# Altium PCB PCB1.PcbDoc
Units mil, origin at the board's own origin, x right, y up, seen from the top; angles counter-clockwise.
Board outline 6000 x 4000 mil, 2 copper layers (Top Layer, Bottom Layer); 127 components, 60 nets, 327 pads, 18 vias.
Unrouted connection lines stored in the file: 71.
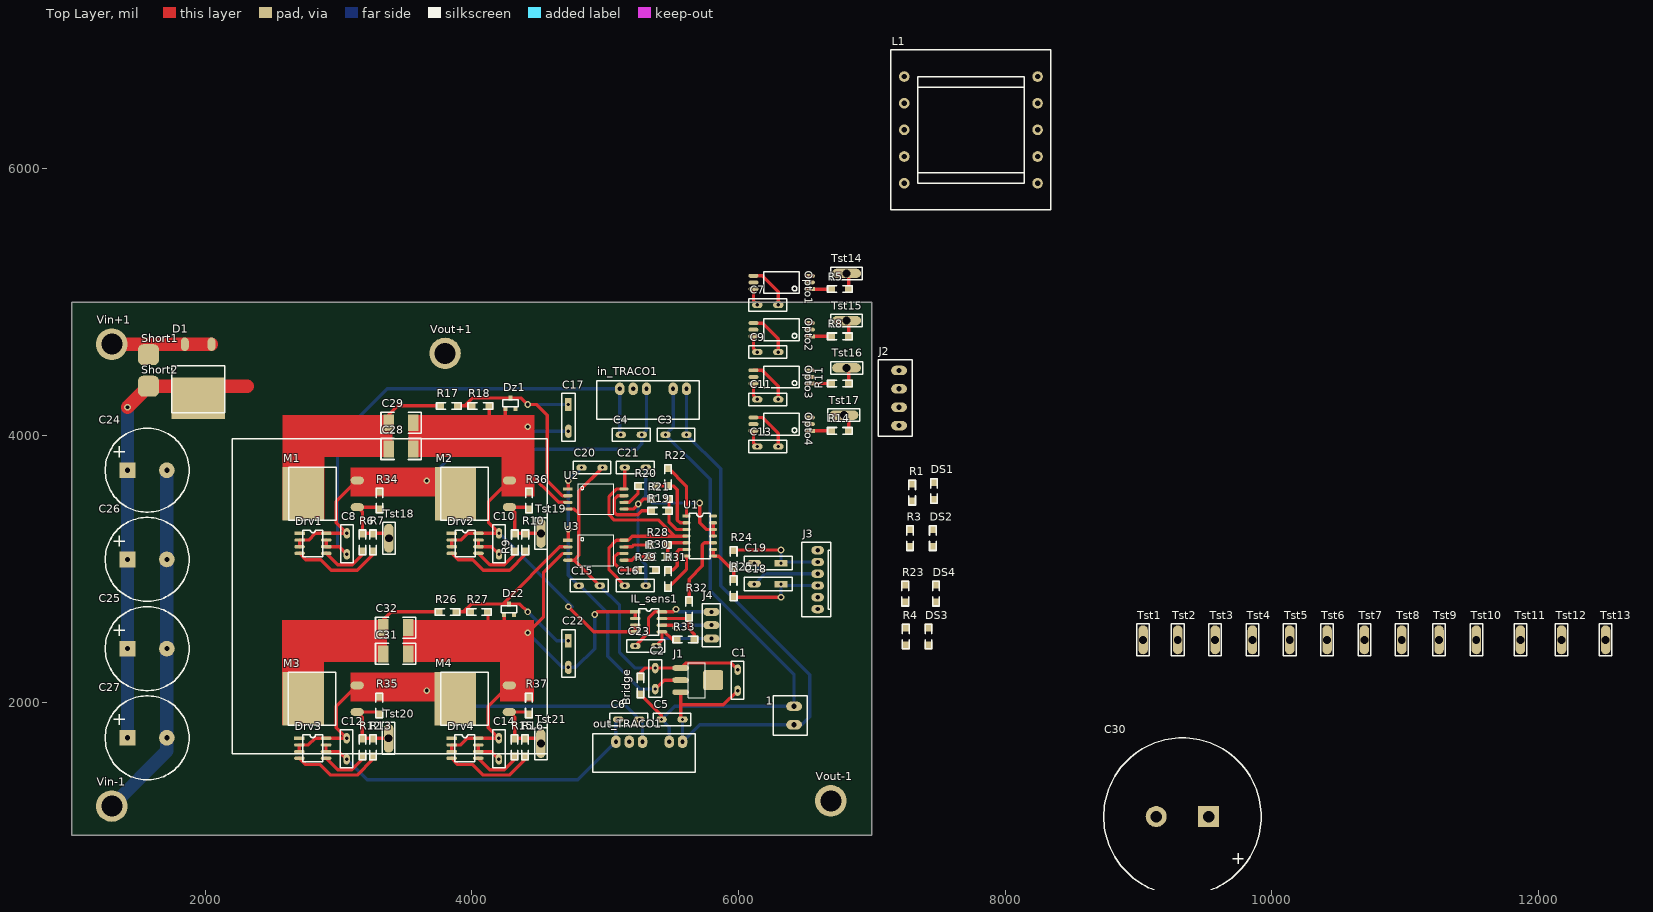
[diagram p0: Top Layer view]
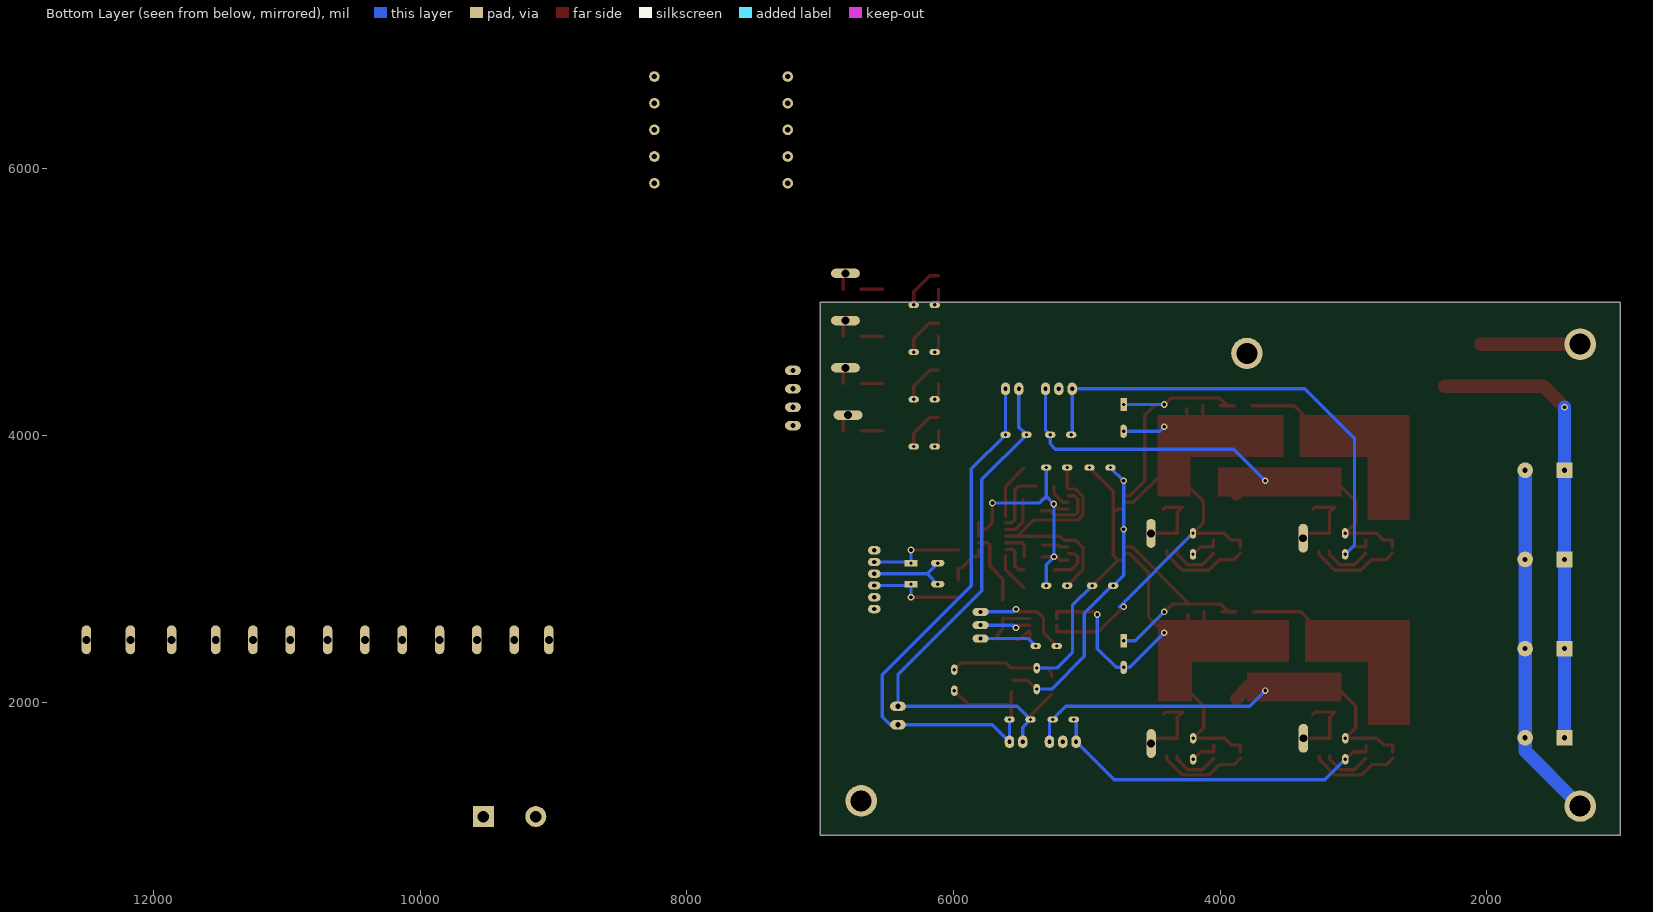
[diagram p1: Bottom Layer view, seen from below]

## Layer stack, top to bottom
Top Solder: solder mask 0.4, Solder Resist, Dk 3.5
Top Layer: signal copper 1.4
Dielectric 1: dielectric 12.6, FR-4, Dk 4.8
Bottom Layer: signal copper 1.4
Bottom Solder: solder mask 0.4, Solder Resist, Dk 3.5

## Board outline
1000,1000 7000,1000 7000,5000 1000,5000

## Design rules (kind name [scope] priority, off if disabled: settings)
Clearance Clearance_1 [All] p1: gap=11.81
Clearance [All] p2: gap=10
PolygonConnect [All] p1: connectstyle=Relief reliefconductorwidth=10 reliefentries=4 polygonreliefangle="90 Angle" airgapwidth=10
RoutingVias [All] p1: holewidth=28 width=50 viastyle="Through Hole" minholewidth=28 minwidth=50 maxholewidth=28 maxwidth=50
SolderMaskExpansion [All] p1: expansion=4
Width [All] p1: maxlimit=393.7 minlimit=11.81 preferedwidth=23.62
30 further rules are at their usual default settings.

## Classes and differential pairs
component class Switches: C24 C25 C26 C27 C28 C29 C30 C31 C32 D1 L1 M1 M2 M3 M4 R34 R35 R36 R37 Short1 Short2 Vin+1 Vin-1 Vout+1 Vout-1
component class Power_supplies: 1 Bridge C1 C2 C3 C4 C5 C6 DS1 DS2 DS3 in_TRACO1 J1 out_TRACO1 R1 R3 R4 Tst1 Tst2 Tst3 Tst4 Tst5 Tst6 Tst7 Tst8 Tst9 Tst10 Tst11 Tst12 Tst13
component class Drivers: C7 C8 C9 C10 C11 C12 C13 C14 C? Drv1 Drv2 Drv3 Drv4 IC? J2 Opto1 Opto2 Opto3 Opto4 R5 R6 R7 R8 R9 R10 R11 R12 R13 R14 R15 R16 Tst14 Tst15 Tst16 Tst17 Tst18 Tst19 Tst20 Tst21
component class Signal_processing: B? C15 C16 C17 C18 C19 C20 C21 C22 C23 DS4 Dz1 Dz2 IL_sens1 J3 J4 R17 R18 R19 R20 R21 R22 R23 R24 R25 R26 R27 R28 R29 R30 R31 R32 R33 U1 U2 U3 U?

## Components (designator, comment, footprint, x,y, rotation, side; value= is the part's Value field where it differs from the comment)
1 "Cleva 2 vias" "CON2_EXTRON _3.5MMPITCH" 6417.32,1968.5 r270 top
Bridge "Res. Bridge" 1206 5265.75,2057.09 r90 top (schematic designator R2)
C1 "100nF" CAP100NF_AAU 5994.09,2244.09 r270 top
C2 "100nF" CAP100NF_AAU 5375.98,2255.91 r270 top
C3 "100nF" CAP100NF_AAU 5452.76,4005.91 r0 top
C4 "100nF" CAP100NF_AAU 5118.11,4005.91 r0 top
C5 "100nF" CAP100NF_AAU 5423.23,1870.08 r0 top
C6 "100nF" CAP100NF_AAU 5098.43,1870.08 r0 top
C7 "100nF" CAP100NF_AAU 6141.73,4980.31 r0 top
C8 "100nF" CAP100NF_AAU 3062.48,3266.14 r270 top
C9 "100nF" CAP100NF_AAU 6141.73,4625.98 r0 top
C10 "100nF" CAP100NF_AAU 4204.21,3266.14 r270 top
C11 "100nF" CAP100NF_AAU 6141.73,4271.65 r0 top
C12 "100nF" CAP100NF_AAU 3061.02,1729.13 r270 top
C13 "100nF" CAP100NF_AAU 6141.73,3917.32 r0 top
C14 "100nF" CAP100NF_AAU 4202.76,1729.13 r270 top
C15 "100nF" CAP100NF_AAU 4960.63,2874.02 r180 top
C16 "100nF" CAP100NF_AAU 5305.12,2874.02 r180 top
C17 "66nF" "CONDENSADOR_MKP_200MILIS - DUPLICATE" 4724.41,4232.28 r270 top
C18 "4.7nF" "CONDENSADOR_MKP_200MILIS - DUPLICATE" 6318.9,2885.43 r180 top
C19 "470pF" "CONDENSADOR_MKP_200MILIS - DUPLICATE" 6318.9,3042.91 r180 top
C20 "100nF" CAP100NF_AAU 4980.31,3759.84 r180 top
C21 "100nF" CAP100NF_AAU 5305.12,3759.84 r180 top
C22 "27nF" "CONDENSADOR_MKP_200MILIS - DUPLICATE" 4724.41,2460.63 r270 top
C23 "100nF" CAP100NF_AAU 5383.86,2421.26 r180 top
C24 "470µF" CE_16DX35MM_PITCH7.5MM 1417.32,3740.16 r0 top
C25 "470µF" CE_16DX35MM_PITCH7.5MM 1417.32,2401.57 r0 top
C26 "470µF" CE_16DX35MM_PITCH7.5MM 1417.32,3070.87 r0 top
C27 "470µF" CE_16DX35MM_PITCH7.5MM 1417.32,1732.28 r0 top
C28 "100nF" 1812 3377.44,3899.21 r0 top
C29 "1uF" 1812 3377.44,4096.06 r0 top
C30 "820µF" CE_30DX35MM_PITCH10MM 9527.56,1141.73 r180 top
C31 "100nF" 1812 3336.61,2362.2 r0 top
C32 "1uF" 1812 3336.61,2559.06 r0 top
D1 "????" "D2PAK - DIODE" 2047.24,4685.04 r180 top
Drv1 "NCP81074A" NCP81074A 2708.15,3266.14 r0 top
Drv2 "NCP81074A" NCP81074A 3849.88,3266.14 r0 top
Drv3 "NCP81074A" NCP81074A 2706.69,1729.13 r0 top
Drv4 "NCP81074A" NCP81074A 3848.43,1729.13 r0 top
DS1 "Verde" "LED SMD" 7466.24,3516.85 r90 top
DS2 "Verde" "LED SMD" 7458.11,3162.52 r90 top
DS3 "Verde" "LED SMD" 7425.56,2424.33 r90 top
DS4 "Verde" "LED SMD" 7481.49,2746.06 r90 top
Dz1 "4.7V" "SOT23 - ZENNER" 4251.97,4202.76 r0 top
Dz2 "4.7V" "SOT23 - ZENNER" 4242.13,2657.48 r0 top
IL_sens1 "ACS723LLCTR-20AB-T" SOIC8_GND 5226.38,2677.17 r0 top
in_TRACO1 "TRACO" TRACO_TMA1212S 5610.24,4350.39 r180 top
J1 "LD1117" SOT-223_LM1117 5688.35,2165.35 r270 top
J2 "CON4" "CON4_EXTRON _3.5MMPITCH" 7204.72,4488.19 r270 top
J3 "CON6" ? 6594.49,2698.43 r90 top
J4 "Cleva 2 vias" CON_3_100MILIS 5797.24,2677.17 r0 top
L1 "mH" E30 7244.09,6692.91 r0 top
M1 "MOSFET N" "D2PAK - MOSFET" 3141.22,3462.99 r90 top
M2 "MOSFET N" "D2PAK - MOSFET" 4282.95,3462.99 r90 top
M3 "MOSFET N" "D2PAK - MOSFET" 3139.76,1925.98 r90 top
M4 "MOSFET N" "D2PAK - MOSFET" 4281.5,1925.98 r90 top
Opto1 "ACPL-W70L" SSOIC6 6535.43,5098.43 r180 top
Opto2 "ACPL-W70L" SSOIC6 6535.43,4744.09 r180 top
Opto3 "ACPL-W70L" SSOIC6 6535.43,4389.76 r180 top
Opto4 "ACPL-W70L" SSOIC6 6535.43,4035.43 r180 top
out_TRACO1 "TRACO" TRACO_TMA1212S 5580.71,1702.76 r180 top
R1 "RK" 1206 7303.15,3503.94 r90 top
R3 "RK" 1206 7287.82,3162.52 r90 top
R4 "RK" 1206 7255.28,2424.33 r90 top
R5 "560OHM" 1206 6692.91,5098.43 r0 top
R6 "25" 1206 3180.59,3266.14 r270 top
R7 "560OHM" 1206 3259.33,3266.14 r270 top
R8 "560OHM" 1206 6692.91,4744.09 r0 top
R9 "560OHM" 1206 4322.32,3266.14 r270 top
R10 "560OHM" 1206 4401.06,3266.14 r270 top
R11 "560OHM" 1206 6692.91,4389.76 r0 top
R12 "560OHM" 1206 3179.13,1729.13 r270 top
R13 "560OHM" 1206 3257.87,1729.13 r270 top
R14 "560OHM" 1206 6692.91,4035.43 r0 top
R15 "560OHM" 1206 4320.87,1729.13 r270 top
R16 "560OHM" 1206 4399.61,1729.13 r270 top
R17 "47k" 1206 3759.84,4222.44 r0 top
R18 "2k" 1206 3996.06,4222.44 r0 top
R19 "11k" 1206 5344.49,3435.04 r0 top
R20 "11k" 1206 5246.06,3622.05 r0 top
R21 "27k" 1206 5479.33,3523.62 r180 top
R22 "27k" 1206 5472.44,3622.05 r90 top
R23 "RK" 1206 7251.16,2746.06 r90 top
R24 "6k8" 1206 5964.57,3141.34 r270 top
R25 "680k" 1206 5964.57,2787.01 r90 top
R26 "120k" 1206 3750,2677.17 r0 top
R27 "2k" 1206 3986.22,2677.17 r0 top
R28 "11k" 1206 5334.65,3179.13 r0 top
R29 "11k" 1206 5246.06,2992.13 r0 top
R30 "27k" 1206 5469.49,3090.55 r180 top
R31 "27k" 1206 5472.44,2992.13 r270 top
R32 "10k" 1206 5629.92,2765.75 r270 top
R33 "10k" 1206 5669.29,2470.47 r180 top
R34 "68K" 1206 3307.09,3444.88 r90 top
R35 "68K" 1206 3305.63,1907.87 r90 top
R36 "68K" 1206 4429.13,3444.88 r90 top
R37 "68K" 1206 4427.68,1907.87 r90 top
Short1 "CON1" SHORTPAD 1574.8,4606.3 r270 top
Short2 "CON1" SHORTPAD 1574.8,4370.08 r270 top
Tst1 "Test Point" TEST_POINT 9035.87,2467.64 r0 top
Tst2 "Test Point" TEST_POINT 9295.73,2467.64 r0 top
Tst3 "Test Point" TEST_POINT 9576.25,2467.64 r0 top
Tst4 "Test Point" TEST_POINT 9855.8,2467.64 r0 top
Tst5 "Test Point" TEST_POINT 10135.34,2467.64 r0 top
Tst6 "Test Point" TEST_POINT 10415.86,2467.64 r0 top
Tst7 "Test Point" TEST_POINT 10695.4,2467.64 r0 top
Tst8 "Test Point" TEST_POINT 10975.93,2467.64 r0 top
Tst9 "Test Point" TEST_POINT 11255.47,2467.64 r0 top
Tst10 "Test Point" TEST_POINT 11535.01,2467.64 r0 top
Tst11 "Test Point" TEST_POINT 11865.74,2467.64 r0 top
Tst12 "Test Point" TEST_POINT 12174.81,2467.64 r0 top
Tst13 "Test Point" TEST_POINT 12505.53,2467.64 r0 top
Tst14 "Test Point" TEST_POINT 6811.02,5216.54 r90 top
Tst15 "Test Point" TEST_POINT 6811.02,4862.2 r90 top
Tst16 "Test Point" TEST_POINT 6811.02,4507.87 r270 top
Tst17 "Test Point" TEST_POINT 6791.34,4153.54 r90 top
Tst18 "Test Point" TEST_POINT 3377.44,3229.92 r180 top
Tst19 "Test Point" TEST_POINT 4519.17,3266.14 r180 top
Tst20 "Test Point" TEST_POINT 3375.98,1729.13 r0 top
Tst21 "Test Point" TEST_POINT 4517.72,1689.76 r180 top
U1 "LMC6484IM" SOIC_14 5610.24,3395.67 r0 top
U2 "ACPL-C870-000E" SSOP8 4931.1,3523.62 r0 top
U3 "ACPL-C870-000E" SSOP8 4931.1,3139.76 r0 top
Vin+1 "CON1" POWERHOLE 1299.21,4685.04 r0 top
Vin-1 "CON1" POWERHOLE 1299.21,1220.47 r0 top
Vout+1 "CON1" POWERHOLE 3799.21,4616.14 r0 top
Vout-1 "CON1" POWERHOLE 6692.91,1259.84 r0 top

## Footprints (in the part's own frame and the unit in brackets; to place one, negate y for a bottom-side part, rotate by r counter-clockwise, add the part's x,y. Pads: shape width x height; smd on the part's side, far side on the other; paste and mask are expansions set on the pad)
1206 [mil] "SMD R&C"
  rect 60x60 smd: 1(0,0) 2(135,0)
  silkscreen extent -25,-25 160,25, body extent 2,-31 128,31
1812 [mm]
  rect 2x3.2 smd: 1(0,0) 2(4.7,0)
  silkscreen extent -1.5,-2 6.2,2
CAP100NF_AAU [mm] "10nF 1600v"
  oval 2x1.2 hole 0.635: 1(0,0) 2(4,0)
  silkscreen extent -1.6,-1.2 5.6,1.2
CE_16DX35MM_PITCH7.5MM [mm]
  rect 3x3 hole 1: 1(0,0)
  round 3 hole 1: 2(7.5,0)
  silkscreen extent -4.25,-8 11.75,8
CE_30DX35MM_PITCH10MM [mm]
  rect 4x4 hole 2.2: 1(0,0)
  round 4 hole 2.2: 2(10,0)
  silkscreen extent -10,-15 20,15
"CON2_EXTRON _3.5MMPITCH" [mm]
  oval 1.8x3 hole 1: 1(0,0) 2(3.5,0)
  silkscreen extent -2,-4 5.5,2.5
"CON4_EXTRON _3.5MMPITCH" [mm]
  oval 1.8x3 hole 1: 1(0,0) 2(3.5,0) 3(7,0) 4(10.5,0)
  silkscreen extent -2,-4 12.5,2.5
CON_3_100MILIS [mil]
  oval 120x60 hole 29.53: 1(0,0) 2(0,-100) 3(0,-200)
  silkscreen extent -70,-260 65,60
"CONDENSADOR_MKP_200MILIS - DUPLICATE" [mil] "10nF 1600v"
  rect 100x50 hole 25: 1(0,0)
  oval 100x50 hole 25: 2(200,0)
  silkscreen extent -84,-50 275,50
"D2PAK - DIODE" [mil] "TO220-superficie"
  oval 60x100 smd: A(0,0) A(200,0)
  rect 400x310 smd: K(100,405)
  silkscreen extent -100,160 300,515
"D2PAK - MOSFET" [mil] "TO220-superficie"
  rect 400x310 smd: D(100,405)
  oval 60x100 smd: G(0,0) S(200,0)
  silkscreen extent -100,160 300,515
E30 [mil]
  round 80 hole 40: 1(0,-800) 1(0,-600) 1(0,-400) 1(0,-200) 1(0,0) 2(1000,-800) 2(1000,-600) 2(1000,-400) 2(1000,-200) 2(1000,0)
  silkscreen extent -100,-1000 1100,200
"LED SMD" [mil] "SMD R&C"
  rect 60x60 smd: A(0,0) K(135,0)
  silkscreen extent -25,-25 160,25
NCP81074A [mil] "Driver"
  rect 80x25 smd: 1(0,0)
  oval 80x25 smd: 2(0,-50) 3(0,-100) 4(0,-150) 5(200,-150) 6(200,-100) 7(200,-50) 8(200,0)
  silkscreen extent 25,-175 175,25
POWERHOLE [mm]
  round 6 hole 4: 1(0,0)
SHORTPAD [mm]
  rrect50% 4x4 smd: 1(0,0)
SOIC8_GND [mil] "Con plano de masa inferior"
  rect 80x25 smd: 1(0,0)
  oval 80x25 smd: 2(0,-50) 3(0,-100) 4(0,-150) 5(200,-150) 6(200,-100) 7(200,-50) 8(200,0)
  silkscreen extent 25,-175 175,25
SOIC_14 [mil]
  rect 60x24 smd: 1(0,0)
  oval 60x24 smd: 2(0,-50) 3(0,-100) 4(0,-150) 5(0,-200) 6(0,-250) 7(0,-300) 8(200,-300) 9(200,-250) 10(200,-200) 11(200,-150) 12(200,-100) 13(200,-50) 14(200,0)
  silkscreen extent 20,-320 180,20
"SOT23 - ZENNER" [mm] "Transistor SMD"
  rect 0.8x0.9 smd: A(0,0) K(0.95,2) NC(1.9,0)
  silkscreen extent -0.5,0.3 2.4,1.7
SOT-223_LM1117 [mm] "SOT-223/SC-73; 4 Leads; Body 6.7 x 7.3 mm, inc. leads (LxW max)"
  oval 1.1x3.15 smd: 1(-2.3,-3.1) 2(0,-3.1) 3(2.3,-3.1)
  rrect20% 3.8x3.8 smd: ""(0,3.1)
  silkscreen extent -3.35,-1.63 3.35,1.63
SSOIC6 [mm] "Circuito de 6 patas SMD"
  rect 1.91x0.762 smd: 1(0,0)
  oval 1.91x0.762 smd: 2(0,-1.27) 3(0,-2.54) 4(10.74,-2.54) 5(10.74,-1.27) 6(10.74,0)
  silkscreen extent 2,-3.34 8.74,0.8
SSOP8 [mm]
  rect 1.8x0.6 smd: 1(-5.35,1.905)
  oval 1.8x0.6 smd: 2(-5.35,0.635) 3(-5.35,-0.635) 4(-5.35,-1.905) 5(5.35,-1.905) 6(5.35,-0.635) 7(5.35,0.635) 8(5.35,1.905)
  silkscreen extent -3.4,-2.93 3.4,2.93
TEST_POINT [mm]
  oval 1.8x5.5 hole 1.5: 1(0,0)
  silkscreen extent -1.2,-3 1.2,3.05
TRACO_TMA1212S [mm]
  oval 1.8x2.4 hole 0.8: 1(0,0) 2(2.54,0) 4(7.62,0) 5(10.16,0) 6(12.7,0)
  silkscreen extent -2.4,-1.5 17.1,5.8
? [mm]
  oval 1.6x2.4 hole 0.8: 1(0,0) 2(2.24,0) 3(4.48,0) 4(6.72,0) 5(8.96,0) 6(11.2,0)
  silkscreen extent -1.5,-2.5 12.7,3

## Part data
1: library part Con_2
Bridge: "Resistencia Bridge"
C1 C2 C3 C4 C5 C6 C7 C8 C9 C10 C11 C12 C13 C14 C15 C16 C17 C18 C19 C20 C21 C22 C23 C28 C29 C31 C32: library part Condensador, "Condensador"
C24 C25 C26 C27 C30: library part Cond_Electrolítico, "Condensador Aluminio con polaridad"
D1: library part Diodo, "Diodo"
DS1 DS2 DS3 DS4: library part Led
Dz1 Dz2: library part Zener
IL_sens1: "Current Sensor AC/DC 5V 8-Pin SOIC N Allegro Microsystems ACS723LLCTR-20AB-T, Current Sensor, 8-Pin, SOIC"
in_TRACO1 out_TRACO1: "TracoPower TMA1212S"
J1: "Linear voltage regulator"
J3: "CONECTOR 6 PINES"
J4: library part Con_3
L1: library part Bobina
M1 M2 M3 M4: "MOSFET de canal N"
R1 R3 R4 R5 R6 R7 R8 R9 R10 R11 R12 R13 R14 R15 R16 R17 R18 R19 R20 R21 R22 R23 R24 R25 R26 R27 R28 R29 R30 R31 R32 R33 R34 R35 R36 R37: library part Resistencia, "Resistencia"
U1: library part LMC6484IM_1, "14 pin CMOS Quad Rail to Rail Input and Output Operational Amplifier 55 per tube"
U2 U3: "Isolation Amplifier [Broadcom] ACPL-C870-000E Isolation Amplifier"

## Via types
v1: diameter 50, hole 28, Top Layer to Bottom Layer, 18 vias

## Nets (pads, with @x,y where several pads share a name; then routed paths per layer and width w, separated by ;. In a path a pad name is that pad's centre, name@x,y a point inside that pad or via, vN(x,y) a via of type N, cw(c..) or ccw(c..) an arc to the next point about the centre after c; other vN are vias at no path point)
5V_HV: C2.2 C15.2 C20.2 DS1.A J1.2 Tst12.1 U2.1 U3.1 | length 2392.8
  Top Layer w25: U2.1 4724.41,3602.56 v1(4724.41,3661.42) ; U3.1@4724.41,3218.7 v1(4724.41,3297.24) ; C2.2 5442.91,2165.35 J1.2@5556.46,2165.35
  Bottom Layer w25: C20.2 v1(4724.41,3661.42) v1(4724.41,3297.24) 4724.41,2952.76 C15.2 4812.99,2874.02 5019.69,2667.32 5019.69,2342.52 5263.78,2098.43 C2.2@5374.02,2098.43
5V_LV: C16.2 C21.2 C23.2 DS4.A IL_sens1.8 J3.6 J4.1 Tst13.1 U1.4 U2.8 U3.8 | length 2704.6
  Top Layer w25: C16.2 5029.53,2992.13 5029.53,3159.45 5084.84,3214.76 U3.8 5173.43,3214.76 5204.33,3245.67 5524.02,3245.67 ; C21.2 5147.64,3604.53 U2.8 5084.84,3598.62 5029.53,3543.31 5029.53,3405.51 5068.9,3366.14 5403.54,3366.14 5524.02,3245.67 ; C23.2 5324.8,2519.69 5324.8,2627.95 5374.02,2677.17 IL_sens1.8 5511.81,2677.17 v1(5531.5,2696.85) ; U1.4 5524.02,3245.67
  Bottom Layer w25: v1(5531.5,2696.85) 5551.18,2677.17 J4.1
12V_HV_HS_IN: C4.1 C7.1 C8.2 Drv1.6 Drv1.7 DS2.A in_TRACO1.6 Opto1.6 Tst10.1 | length 3876
  Top Layer w25: Drv1.7 Drv1.6 3005,3166.14 C8.2 ; Opto1.6 6112.6,5009.45 C7.1
  Bottom Layer w25: C8.2 2992.13,3179.02 2992.13,3976.38 3366.14,4350.39 in_TRACO1.6 5110.24,4013.78 C4.1
12V_HV_HS_OUT: C6.1 C11.1 C12.2 Drv3.6 Drv3.7 DS3.A Opto3.6 out_TRACO1.6 Tst11.1 | length 2734.8
  Top Layer w25: Drv3.7 Drv3.6 3003.54,1629.13 C12.2 ; Opto3.6 6112.6,4300.79 C11.1
  Bottom Layer w25: C12.2 3215.35,1417.32 4795.28,1417.32 out_TRACO1.6 5080.71,1852.36 C6.1
12V_HV_LS: 1.2 C1.2 C3.2 C5.2 C9.1 C10.2 C13.1 C14.2 Drv2.6 Drv2.7 Drv4.6 Drv4.7 in_TRACO1.1 J1.3 Opto2.6 Opto4.6 out_TRACO1.1 Tst9.1 | length 5422.4
  Top Layer w25: Drv4.7 Drv4.6 4145.28,1629.13 C14.2 ; Drv2.7 Drv2.6 4146.73,3166.14 C10.2 ; C5.2@5566.3,1884.49 5566.3,1979.65 ; J1.3 5566.3,1979.65 ; C1.2 5887.13,1979.65 5566.3,1979.65 ; Opto4.6 6112.6,3946.46 C13.1 ; Opto2.6 6112.6,4655.12 C9.1
  Bottom Layer w25: C5.2 out_TRACO1.1 5708.66,1830.71 1.2 6476.38,1830.71 6535.43,1889.76 6535.43,2204.72 5866.14,2874.02 5866.14,3750 C3.2 in_TRACO1.1
GND_HV_HS_IN: C4.2 C7.2 C8.1 Drv1.2 Drv1.3 Drv1.8 in_TRACO1.4 L1.1 M1.S M2.D Opto1.4 R3.2 R34.2 Tst3.1 | length 3531
  Top Layer w25: Drv1.3 Drv1.2 2776.26,3216.14 2826.26,3266.14 Drv1.8 C8.1 2983.74,3344.88 2983.74,3505.51 M1.S ; Opto1.4 6179.53,5198.43 6299.21,5078.74 C7.2
  Top Layer w100: M2.D@3777.95,3662.99 M2.D
  Bottom Layer w25: v1(3661.42,3661.42) 3897.64,3897.64 5236.22,3897.64 5275.59,3937.01 C4.2 ; C4.2@5290.35,4020.67 5310.24,4040.55 in_TRACO1.4
GND_HV_HS_OUT: C6.2 C11.2 C12.1 Drv3.2 Drv3.3 Drv3.8 L1.2 M3.S M4.D Opto3.4 out_TRACO1.4 R4.2 R35.2 Tst4.1 | length 3894.3
  Top Layer w25: Drv3.3 Drv3.2 2774.8,1679.13 2824.8,1729.13 Drv3.8 C12.1 2982.28,1807.87 2982.28,1968.5 M3.S ; Opto3.4 6179.53,4489.76 6299.21,4370.08 C11.2
  Top Layer w100: M3.S 3776.5,2125.98 M4.D
  Bottom Layer w25: v1(3661.42,2086.61) 3779.53,1968.5 5157.48,1968.5 C6.2 5280.71,1845.28 out_TRACO1.4
GND_HV_LS_IN: 1.1 Bridge.1 C3.1 C5.1 C9.2 C10.1 C17.2 C24.2 C25.2 C26.2 C27.2 C28.2 C29.2 Drv2.2 Drv2.3 Drv2.8 Dz1.A IL_sens1.3 IL_sens1.4 in_TRACO1.2 M2.S Opto2.4 out_TRACO1.2 R18.2 R36.2 Tst1.1 U2.3 Vin-1.1 | length 11056.6
  Top Layer w25: Drv2.3 Drv2.2 3917.99,3216.14 3967.99,3266.14 Drv2.8 C10.1 4125.47,3344.88 4125.47,3505.51 M2.S ; 4131.06,4121.22 R18.2 ; 4251.97,4133.86 Dz1.A ; 4409.45,3740.16 4650.98,3498.62 U2.3 ; v1(4724.41,2716.54) 4913.78,2527.17 IL_sens1.4 IL_sens1.3 ; Bridge.1 5423.23,1899.61 C5.1 ; Opto2.4 6114.17,4842.52 6181.1,4842.52 6299.21,4724.41 C9.2
  Bottom Layer w25: C10.1 4753.82,2716.54 v1(4724.41,2716.54) ; v1(4419.29,4064.96) 4451.97,4032.28 C17.2 ; C3.1 5787.4,3671.26 5787.4,2834.65 6417.32,2204.72 1.1 ; C3.1@5467.52,4020.67 5510.24,4063.39 in_TRACO1.2 ; out_TRACO1.2 5480.71,1812.6 C5.1 5521.65,1968.5 1.1 ; 5905.51,1968.5 1.1
  Bottom Layer w100: Vin-1.1 1712.6,1633.86 C27.2 C25.2 C26.2 C24.2
GND_HV_LS_OUT: C13.2 C14.1 C22.2 C30.2 C31.2 C32.2 Drv4.2 Drv4.3 Drv4.8 Dz2.A IL_sens1.1 IL_sens1.2 M4.S Opto4.4 R27.2 R37.2 Tst2.1 U3.3 Vout-1.1 | length 3504.2
  Top Layer w25: Drv4.3 Drv4.2 3916.54,1679.13 3966.54,1729.13 Drv4.8 C14.1 4124.02,1807.87 4124.02,1968.5 M4.S ; 4121.22,2556.26 R27.2 ; 4242.13,2559.06 Dz2.A ; v1(4419.29,2519.68) 4537.4,2637.8 4537.4,2972.44 4679.72,3114.76 U3.3 ; v1(4921.26,2657.48) 4940.94,2677.17 IL_sens1.1 IL_sens1.2 ; Opto4.4 6179.53,4135.43 6299.21,4015.75 C13.2
  Bottom Layer w25: v1(4419.29,2519.68) 4678.35,2260.63 C22.2 4780.31,2260.63 4921.26,2401.57 v1(4921.26,2657.48)
GND_HV_SENSORS: Bridge.2 C1.1 C2.1 C15.1 C20.1 J1.1 R1.2 Tst5.1 U2.4 U3.4 | length 2885
  Top Layer w25: U3.4 4767.52,3064.76 4803.15,3100.39 4803.15,3415.35 ; U2.4 4769.88,3448.62 4803.15,3415.35 ; 4769.88,3064.76 C15.1 ; C20.1 4803.15,3582.68 4803.15,3415.35 ; Bridge.2 5265.75,2224.41 5297.24,2255.91 C2.1 J1.1 5603.7,2293.31 5944.88,2293.31 C1.1
  Bottom Layer w25: C15.1 5108.27,2726.38 5108.27,2372.05 5224.41,2255.91 C2.1
GND_LV: C16.1 C18.2 C19.2 C21.1 C23.1 IL_sens1.5 J3.4 J4.3 Opto1.3 Opto2.3 Opto3.3 Opto4.3 R21.2 R23.2 R30.2 R33.2 Tst6.1 U1.11 U1.12 U1.13 U2.5 U3.5 | length 3455.9
  Top Layer w25: U3.5 5200.59,3064.76 5226.38,3090.55 v1(5246.06,3090.55) R30.2 ; U2.5 5210.43,3448.62 v1(5247.93,3486.12) 5285.43,3523.62 R21.2 ; C23.1 5426.38,2463.78 IL_sens1.5 5445.28,2527.17 5501.97,2470.47 R33.2 ; v1(5708.66,3494.09) 5708.66,3346.46 5759.45,3295.67 U1.12 ; U1.11 U1.12 ; U1.13 U1.12
  Bottom Layer w25: v1@5246.06,3484.25 v1(5246.06,3090.55) 5305.12,3031.5 C16.1 ; v1(5247.93,3486.12) 5305.12,3543.31 ; C21.1@5305.12,3740.16 5305.12,3543.31 ; C23.1 5439.76,2477.17 J4.3 ; v1(5708.66,3494.09) 5354.33,3494.09 5305.12,3543.31 ; C18.2 6121.26,2885.43 6198.82,2962.99 ; C19.2 6198.82,2962.99 ; J3.4 6198.82,2962.99
NetC18_1: C18.1 J3.3 R25.1 | length 732.7
  Top Layer w25: R25.1 v1(6318.9,2787.01)
  Bottom Layer w25: v1(6318.9,2787.01) C18.1 6329.53,2874.8 J3.3
NetC19_1: C19.1 J3.5 R24.1 | length 731.8
  Top Layer w25: R24.1 v1(6318.9,3141.34)
  Bottom Layer w25: v1(6318.9,3141.34) C19.1 6327.17,3051.18 J3.5
NetC24_1: C24.1 C25.1 C26.1 C27.1 C28.1 C29.1 D1.K M1.D R17.1 Short2.1 Tst7.1 | length 3913.5
  Top Layer w25: C29.1 3377.44,4155 3444.88,4222.44 R17.1
  Top Layer w100: v1(1417.32,4212.6) Short2.1 2316.02,4370.08
  Bottom Layer w100: C27.1 C25.1 C26.1 C24.1 v1(1417.32,4212.6)
NetC30_1: C30.1 C31.1 C32.1 M3.D R26.1 Tst8.1 Vout+1.1 | length 508.6
  Top Layer w25: C32.1@3328.23,2550.79 3328.23,2609.72 3395.67,2677.17 R26.1
NetD1_A: D1.A Short1.1 Vin+1.1 | length 748
  Top Layer w100: Vin+1.1 1847.24,4685.04 D1.A@2047.24,4685.04
NetDrv1_1: Drv1.1 Opto1.5
NetDrv1_4: Drv1.4 R7.2 | length 674.6
  Top Layer w25: Drv1.4 2755,3069.29 2865.63,3069.29 2944.37,2990.55 3141.22,2990.55 3259.33,3108.66 R7.2
NetDrv1_5: Drv1.5 R6.2 | length 363.3
  Top Layer w25: Drv1.5 2994.37,3029.92 3101.85,3029.92 3180.59,3108.66 R6.2
NetDrv2_1: Drv2.1 Opto2.5
NetDrv2_4: Drv2.4 R10.2 | length 674.6
  Top Layer w25: Drv2.4 3896.73,3069.29 4007.36,3069.29 4086.1,2990.55 4282.95,2990.55 4401.06,3108.66 R10.2
NetDrv2_5: Drv2.5 R9.2 | length 363.3
  Top Layer w25: Drv2.5 4136.1,3029.92 4243.58,3029.92 4322.32,3108.66 R9.2
NetDrv3_1: Drv3.1 Opto3.5
NetDrv3_4: Drv3.4 R13.2 | length 674.6
  Top Layer w25: Drv3.4 2753.54,1532.28 2864.17,1532.28 2942.91,1453.54 3139.76,1453.54 3257.87,1571.65 R13.2
NetDrv3_5: Drv3.5 R12.2 | length 363.3
  Top Layer w25: Drv3.5 2992.91,1492.91 3100.39,1492.91 3179.13,1571.65 R12.2
NetDrv4_1: Drv4.1 Opto4.5
NetDrv4_4: Drv4.4 R16.2 | length 674.6
  Top Layer w25: Drv4.4 3895.28,1532.28 4005.91,1532.28 4084.65,1453.54 4281.5,1453.54 4399.61,1571.65 R16.2
NetDrv4_5: Drv4.5 R15.2 | length 363.3
  Top Layer w25: Drv4.5 4134.65,1492.91 4242.13,1492.91 4320.87,1571.65 R15.2
NetDS1_K: DS1.K R1.1
NetDS2_K: DS2.K R3.1
NetDS3_K: DS3.K R4.1
NetDS4_K: DS4.K R23.1
NetIL_sens1_6: IL_sens1.6 J4.2 | length 385.9
  Top Layer w25: IL_sens1.6 5513.39,2577.17 v1(5531.5,2559.06)
  Bottom Layer w25: v1(5531.5,2559.06) 5549.61,2577.17 J4.2
NetIL_sens1_7: IL_sens1.7 R32.2 R33.1 | length 376.5
  Top Layer w25: IL_sens1.7 R32.2@5626.34,2627.17 ; R32.2 5629.92,2549.21 5669.29,2509.84 R33.1
NetJ2_1: J2.1 R5.2 Tst14.1 | length 125.1
  Top Layer w25: Tst14.1 6827.91,5199.65 R5.2
NetJ2_2: J2.2 R8.2 Tst15.1 | length 125.1
  Top Layer w25: Tst15.1 6827.91,4845.31 R8.2
NetJ2_3: J2.3 R11.2 Tst16.1 | length 125.1
  Top Layer w25: Tst16.1 6827.91,4490.98 R11.2
NetJ2_4: J2.4 R14.2 Tst17.1 | length 133.3
  Top Layer w25: Tst17.1 6827.91,4116.97 R14.2
NetJ3_1: J3.1 R22.2 U1.1 | length 418.5
  Top Layer w25: R22.2 5610.24,3619.25 U1.1
NetJ3_2: J3.2 R31.2 U1.7 | length 295.6
  Top Layer w25: R31.2 5610.24,2994.92 U1.7
NetM1_G: M1.G R6.1 R7.1 R34.1 Tst18.1 | length 598.4
  Top Layer w25: R34.1 3288.98,3462.99 M1.G 3180.59,3423.62 R6.1 R7.1 3341.22,3266.14 Tst18.1
NetM2_G: M2.G R9.1 R10.1 R36.1 Tst19.1 | length 563.7
  Top Layer w25: R36.1 4411.02,3462.99 M2.G 4322.32,3423.62 R9.1 R10.1 Tst19.1
NetM3_G: M3.G R12.1 R13.1 R35.1 Tst20.1 | length 583.4
  Top Layer w25: R35.1 3287.52,1925.98 M3.G 3179.13,1886.61 R12.1 R13.1 Tst20.1
NetM4_G: M4.G R15.1 R16.1 R37.1 Tst21.1 | length 580
  Top Layer w25: R37.1 4409.57,1925.98 M4.G 4320.87,1886.61 R15.1 R16.1 4478.35,1729.13 Tst21.1
NetOpto1_1: Opto1.1 R5.1 | length 157.5
  Top Layer w25: Opto1.1 R5.1
NetOpto2_1: Opto2.1 R8.1 | length 157.5
  Top Layer w25: Opto2.1 R8.1
NetOpto3_1: Opto3.1 R11.1 | length 157.5
  Top Layer w25: Opto3.1 R11.1
NetOpto4_1: Opto4.1 R14.1 | length 157.5
  Top Layer w25: Opto4.1 R14.1
NetR19_1: R19.1 U2.7 | length 477.6
  Top Layer w25: U2.7 5093.9,3548.62 5068.9,3523.62 5068.9,3425.2 5088.58,3405.51 5246.06,3405.51 5275.59,3435.04 R19.1
NetR19_2: R19.2 R21.1 U1.3 | length 327.3
  Top Layer w25: R21.1@5479.49,3523.62 5479.49,3349.25 5533.07,3295.67 U1.3
NetR20_1: R20.1 U2.6 | length 190
  Top Layer w25: U2.6 5181.69,3498.62 5246.06,3562.99 R20.1
NetR20_2: R20.2 R22.1 U1.2 | length 476.3
  Top Layer w25: R20.2 5511.81,3622.05 5541.34,3592.52 5541.34,3366.14 5561.81,3345.67 U1.2
NetR24_2: R24.2 R25.2 U1.8 U1.9 | length 325.7
  Top Layer w25: U1.9 U1.8 5851.18,3095.67 5940.51,3006.34 R24.2 R25.2
NetR28_1: R28.1 U3.7 | length 198.9
  Top Layer w25: U3.7 5202.17,3164.76 5216.54,3179.13 R28.1
NetR28_2: R28.2 R30.1 U1.5 | length 235.9
  Top Layer w25: R30.1@5469.65,3090.71 R28.2 5486.18,3195.67 U1.5
NetR29_1: R29.1 U3.6 | length 329.6
  Top Layer w25: U3.6 5093.11,3114.76 5068.9,3090.55 5068.9,3041.34 5118.11,2992.13 R29.1
NetR29_2: R29.2 R31.1 U1.6 | length 264.8
  Top Layer w25: R31.1 5511.81,2992.13 5541.34,3021.65 5541.34,3129.92 5557.09,3145.67 U1.6
NetR32_1: R32.1 U1.10 | length 542.9
  Top Layer w25: R32.1 5629.92,2923.23 5728.35,3021.65 5728.35,3179.13 5744.88,3195.67 U1.10
VIN_SEN: C17.1 Dz1.K R17.2 R18.1 U2.2 | length 1797.7
  Top Layer w25: R17.2 3945.45,4222.44 ; R18.1 3945.45,4222.44 ; U2.2 4679.72,3548.62 4566.93,3661.42 4566.93,4153.54 4488.19,4232.28 v1(4419.29,4232.28) 4370.08,4281.5 Dz1.K 4004.51,4281.5 3945.45,4222.44
  Bottom Layer w25: v1(4419.29,4232.28) C17.1
VOUT_SEN: C22.1 Dz2.K R26.2 R27.1 U3.2 | length 1694.3
  Top Layer w25: R26.2 3935.61,2677.17 ; R27.1 3935.61,2677.17 ; v1(4419.29,2677.17) 4360.24,2736.22 Dz2.K 4232.28,2736.22 ; U3.2 4660.83,3164.76 4232.28,2736.22 ; 3935.61,2677.17 3994.67,2736.22 4232.28,2736.22
  Bottom Layer w25: v1(4419.29,2677.17) 4635.83,2460.63 C22.1
pads on no net: Dz1.NC Dz2.NC in_TRACO1.5 J1. Opto1.2 Opto2.2 Opto3.2 Opto4.2 out_TRACO1.5 U1.14

## Other copper
Top Layer:
  rectangle net GND_HV_LS_IN: 4222.44,3543.31 4468.5,4153.54
  rectangle net GND_HV_LS_IN: 3523.62,3838.58 4350.39,4153.54
  rectangle net GND_HV_HS_IN: 3090.55,3543.31 4015.75,3759.84
  rectangle net NetC24_1: 2578.74,3366.14 2893.7,4153.54
  rectangle net NetC24_1: 2834.65,3838.58 3405.51,4153.54
  rectangle net GND_HV_LS_OUT: 4211.14,2006.3 4467.05,2616.54
  rectangle net GND_HV_LS_OUT: 3482.8,2301.57 4230.83,2616.54
  rectangle net NetC30_1: 2577.28,1829.13 2892.24,2616.54
  rectangle net NetC30_1: 2833.19,2301.57 3364.68,2616.54
  rectangle net GND_HV_HS_OUT: 3089.09,2006.3 3797.76,2222.83

## Silkscreen, mask and mechanical layers (free items; w line width, h text height)
Top Overlay:
  lines w10: 2204.72,1614.17 4566.93,1614.17 4566.93,3976.38 2204.72,3976.38 2204.72,1614.17